# EAGLE board LED_board (EAGLE 9.6.2)
REV: A
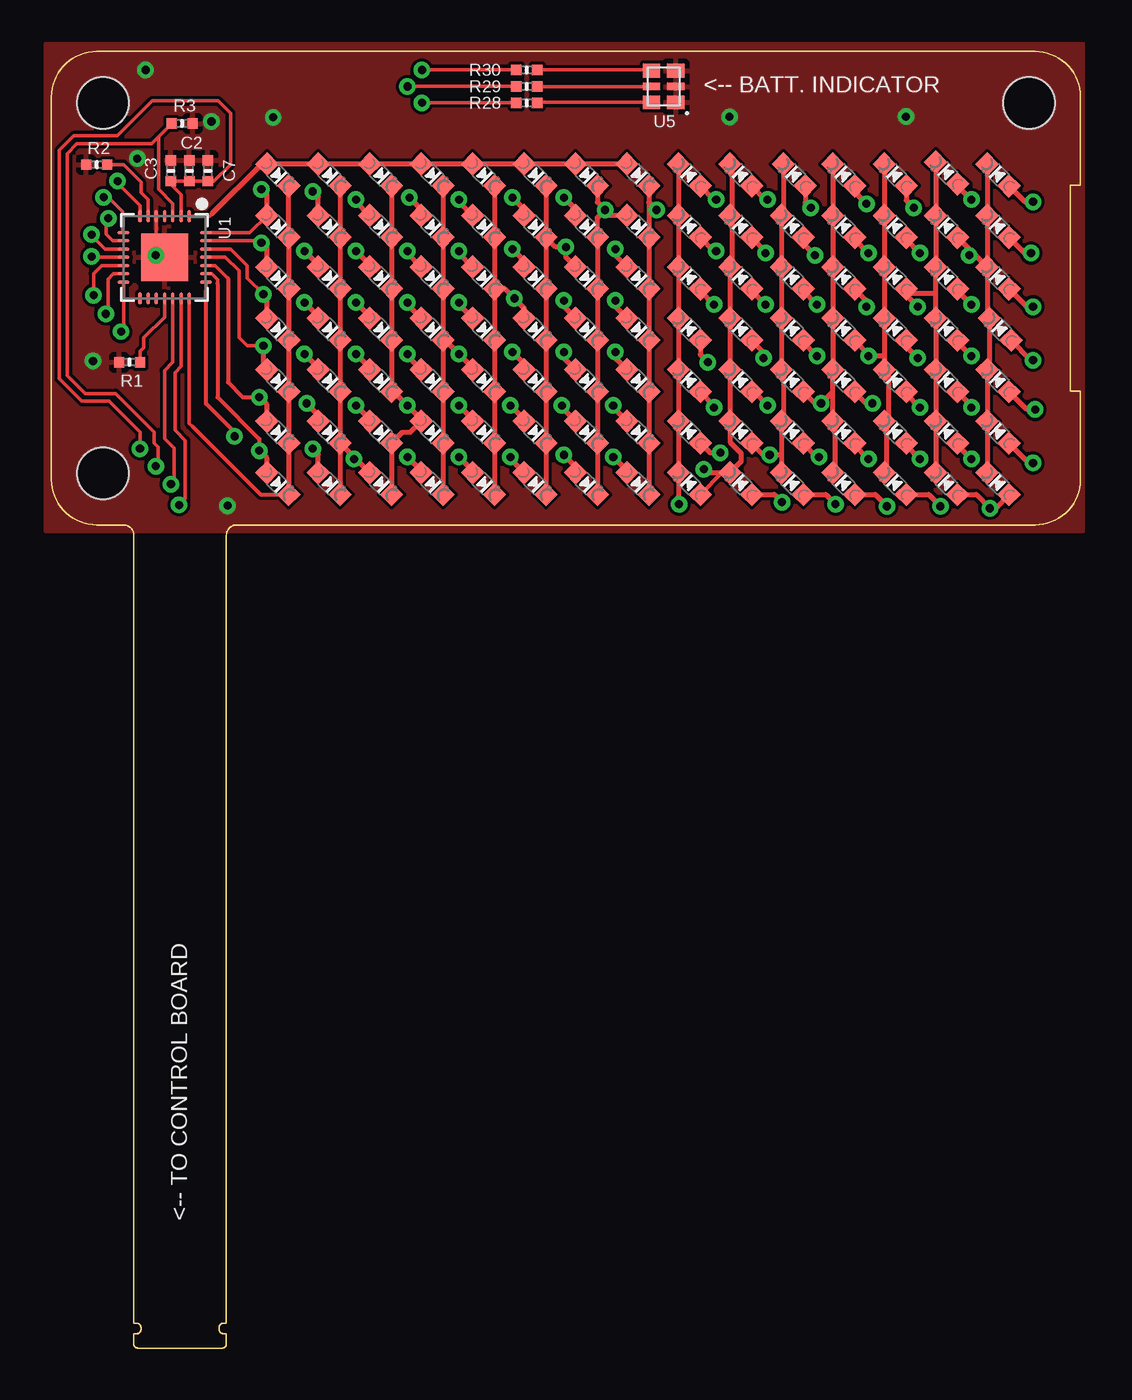
[diagram p0: board, top side]
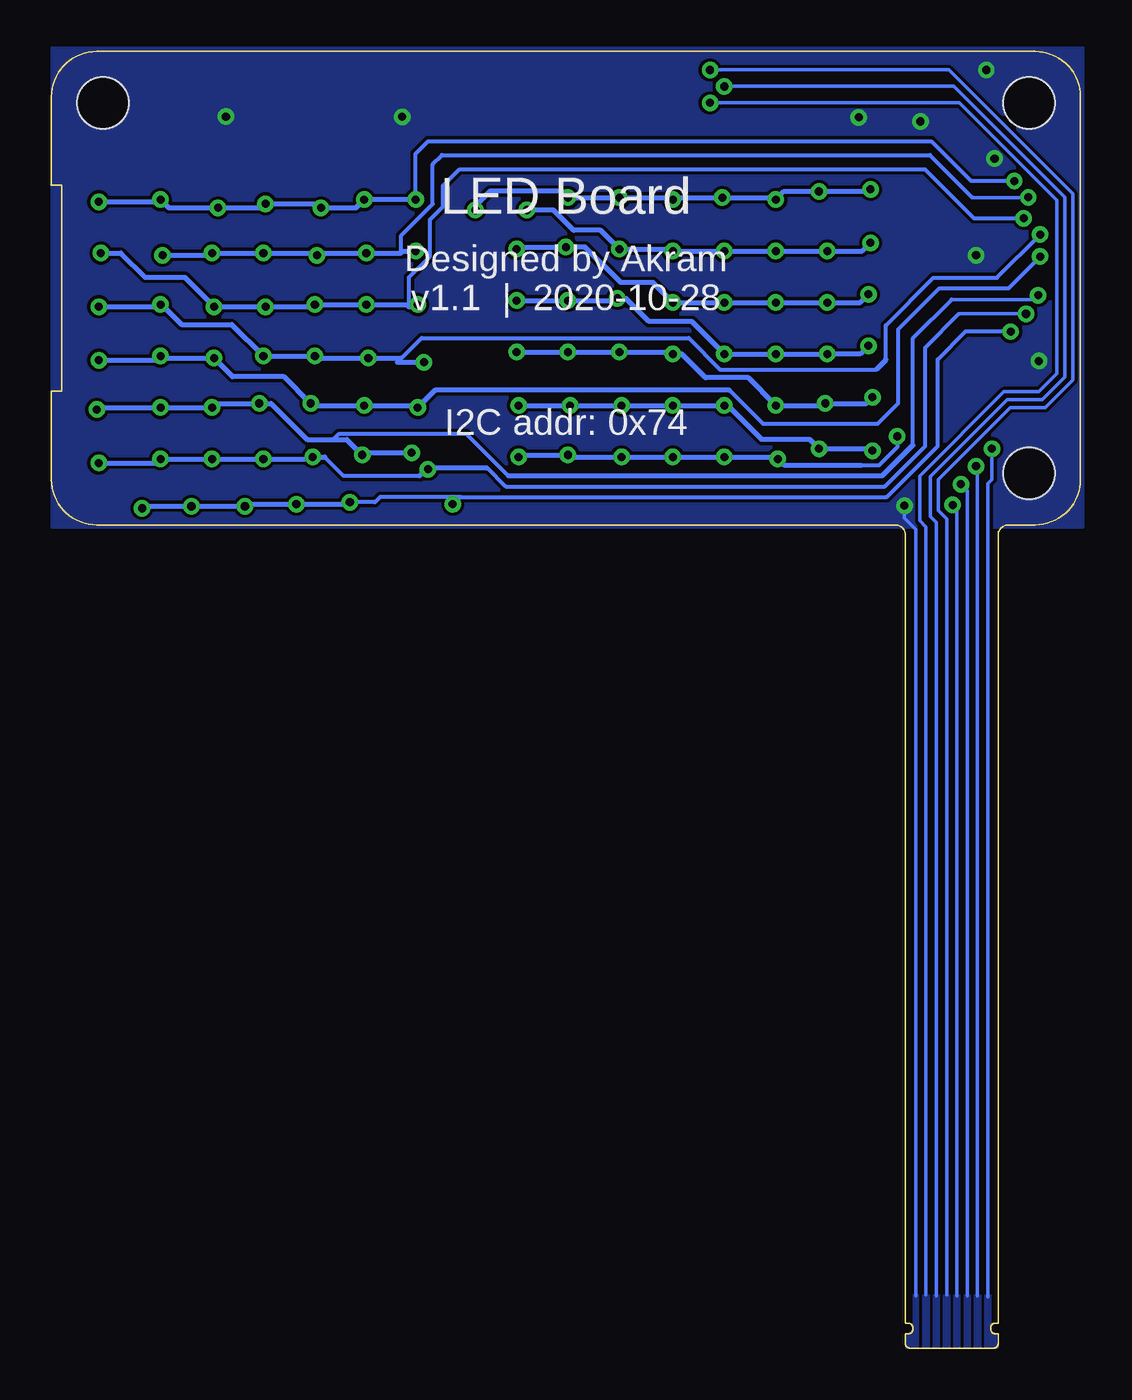
[diagram p1: board, bottom side, seen from below]

Size 50 x 63 mm. Coordinates in mm from the lower left corner, seen from the top.
Outline: 47.8,40 9,40 arc90 8.5,39.5 8.5,1.2 8.35,1.2 arc90 8.15,1 8.15,0.9 arc90 8.35,0.7 8.5,0.7 8.5,0.2 arc-90 8.3,0 4.2,0 arc-90 4,0.2 4,0.7 4.15,0.7 arc90 4.35,0.9 4.35,1 arc90 4.15,1.2 4,1.2 4,39.5 arc90 3.5,40 2.2,40 arc-90 0,42.2 0,60.8 arc-90 2.2,63 47.8,63 arc-90 50,60.8 50,56.5 49.5,56.5 49.5,46.5 50,46.5 50,42.2 arc-90 47.8,40
Copper layers (1*16): Top 0.035mm / dielectric 1.5mm / Bottom 0.035mm
Design rules "adafruit *": minimum track width 7mil, minimum drill 15.5mil, track to track 6mil, track to pad 6mil, pad to pad 6mil, via to via 6mil, smd to smd 6mil, copper to edge 0mil, drill to drill 8mil, minimum pad ring 10mil, minimum via ring 8mil, stop-mask expansion 2mil, vias tented up to drill 20mil, thermal gap 10mil
Holes 2.5 mm at 2.5,60.5 2.5,42.5 47.5,60.5

## Footprints (pad centres in the part's own frame; a part is rotated, then mirrored left to right if it is on the bottom)
CHIPLED_0603_NOOUTLINE = smd 0.8 x 0.8: A 0,-0.75; C 0,0.75
MICROBUILDER__0402MP = smd 0.5 x 0.5: 1 -0.508,0; 2 0.508,0
QFN28_4MM_0.4MM = smd 0.6 x 0.18: 1 -2,1.2; 2 -2,0.8; 3 -2,0.4; 4 -2,0; 5 -2,-0.4; 6 -2,-0.8; 7 -2,-1.2; 15 2,-1.2; 16 2,-0.8; 17 2,-0.4; 18 2,0; 19 2,0.4; 20 2,0.8; 21 2,1.2 | smd 0.18 x 0.6: 8 -1.2,-2; 9 -0.8,-2; 10 -0.4,-2; 11 0,-2; 12 0.4,-2; 13 0.8,-2; 14 1.2,-2; 22 1.2,2; 23 0.8,2; 24 0.4,2; 25 0,2; 26 -0.4,2; 27 -0.8,2; 28 -1.2,2 | smd 2.3 x 2.3: THERMAL 0,0
SMD-6 = smd 0.67 x 0.83: B+ 1.675,0.215; B- 1.675,1.385; R+ 0.135,0.215; R- 0.135,1.385 | smd 0.37 x 0.83: G+ 0.905,0.215; G- 0.905,1.385

## Placement (x,y rotation side)
C1-2  [CHIPLED_0603_NOOUTLINE]  11,42 225 top
C1-3  [CHIPLED_0603_NOOUTLINE]  11,44.5 225 top
C1-4  [CHIPLED_0603_NOOUTLINE]  11,47 225 top
C1-5  [CHIPLED_0603_NOOUTLINE]  11,49.5 225 top
C1-6  [CHIPLED_0603_NOOUTLINE]  11,52 225 top
C1-7  [CHIPLED_0603_NOOUTLINE]  11,54.5 225 top
C1-8  [CHIPLED_0603_NOOUTLINE]  11,57 225 top
C2  0.1uF  [MICROBUILDER__0402MP]  6.7,57.2 90 top
C2-2  [CHIPLED_0603_NOOUTLINE]  13.5,42 225 top
C2-3  [CHIPLED_0603_NOOUTLINE]  13.5,44.5 225 top
C2-4  [CHIPLED_0603_NOOUTLINE]  13.5,47 225 top
C2-5  [CHIPLED_0603_NOOUTLINE]  13.5,49.5 225 top
C2-6  [CHIPLED_0603_NOOUTLINE]  13.5,52 225 top
C2-7  [CHIPLED_0603_NOOUTLINE]  13.5,54.5 225 top
C2-8  [CHIPLED_0603_NOOUTLINE]  13.5,57 225 top
C2-9  [CHIPLED_0603_NOOUTLINE]  46,57 45 top
C2-10  [CHIPLED_0603_NOOUTLINE]  46,54.5 45 top
C2-11  [CHIPLED_0603_NOOUTLINE]  46,52 45 top
C2-12  [CHIPLED_0603_NOOUTLINE]  46.1,49.5 45 top
C2-13  [CHIPLED_0603_NOOUTLINE]  46,47 45 top
C2-14  [CHIPLED_0603_NOOUTLINE]  46,44.5 45 top
C2-15  [CHIPLED_0603_NOOUTLINE]  46,42 45 top
C3  10uF  [MICROBUILDER__0402MP]  5.8,57.2 90 top
C3-2  [CHIPLED_0603_NOOUTLINE]  16,42 225 top
C3-3  [CHIPLED_0603_NOOUTLINE]  16,44.5 225 top
C3-4  [CHIPLED_0603_NOOUTLINE]  16,47 225 top
C3-5  [CHIPLED_0603_NOOUTLINE]  16,49.5 225 top
C3-6  [CHIPLED_0603_NOOUTLINE]  16,52 225 top
C3-7  [CHIPLED_0603_NOOUTLINE]  16,54.5 225 top
C3-8  [CHIPLED_0603_NOOUTLINE]  16,57 225 top
C3-9  [CHIPLED_0603_NOOUTLINE]  43.5,57.1 45 top
C3-10  [CHIPLED_0603_NOOUTLINE]  43.5,54.5 45 top
C3-11  [CHIPLED_0603_NOOUTLINE]  43.5,52 45 top
C3-12  [CHIPLED_0603_NOOUTLINE]  43.5,49.5 45 top
C3-13  [CHIPLED_0603_NOOUTLINE]  43.5,47 45 top
C3-14  [CHIPLED_0603_NOOUTLINE]  43.5,44.5 45 top
C3-15  [CHIPLED_0603_NOOUTLINE]  43.5,42 45 top
C4-2  [CHIPLED_0603_NOOUTLINE]  18.5,42 225 top
C4-3  [CHIPLED_0603_NOOUTLINE]  18.5,44.5 225 top
C4-4  [CHIPLED_0603_NOOUTLINE]  18.5,47 225 top
C4-5  [CHIPLED_0603_NOOUTLINE]  18.5,49.5 225 top
C4-6  [CHIPLED_0603_NOOUTLINE]  18.5,52 225 top
C4-7  [CHIPLED_0603_NOOUTLINE]  18.5,54.5 225 top
C4-8  [CHIPLED_0603_NOOUTLINE]  18.5,57 225 top
C4-9  [CHIPLED_0603_NOOUTLINE]  41,57 45 top
C4-10  [CHIPLED_0603_NOOUTLINE]  41,54.5 45 top
C4-11  [CHIPLED_0603_NOOUTLINE]  41,52 45 top
C4-12  [CHIPLED_0603_NOOUTLINE]  41,49.5 45 top
C4-13  [CHIPLED_0603_NOOUTLINE]  41,47 45 top
C4-14  [CHIPLED_0603_NOOUTLINE]  41,44.5 45 top
C4-15  [CHIPLED_0603_NOOUTLINE]  41,42 45 top
C5-2  [CHIPLED_0603_NOOUTLINE]  21,42 225 top
C5-3  [CHIPLED_0603_NOOUTLINE]  21,44.5 225 top
C5-4  [CHIPLED_0603_NOOUTLINE]  21,47 225 top
C5-5  [CHIPLED_0603_NOOUTLINE]  21,49.5 225 top
C5-6  [CHIPLED_0603_NOOUTLINE]  21,52 225 top
C5-7  [CHIPLED_0603_NOOUTLINE]  21,54.5 225 top
C5-8  [CHIPLED_0603_NOOUTLINE]  21,57 225 top
C5-9  [CHIPLED_0603_NOOUTLINE]  38.5,57 45 top
C5-10  [CHIPLED_0603_NOOUTLINE]  38.5,54.5 45 top
C5-11  [CHIPLED_0603_NOOUTLINE]  38.5,52 45 top
C5-12  [CHIPLED_0603_NOOUTLINE]  38.5,49.5 45 top
C5-13  [CHIPLED_0603_NOOUTLINE]  38.5,47 45 top
C5-14  [CHIPLED_0603_NOOUTLINE]  38.5,44.5 45 top
C5-15  [CHIPLED_0603_NOOUTLINE]  38.5,42 45 top
C6-2  [CHIPLED_0603_NOOUTLINE]  23.5,42 225 top
C6-3  [CHIPLED_0603_NOOUTLINE]  23.5,44.5 225 top
C6-4  [CHIPLED_0603_NOOUTLINE]  23.5,47 225 top
C6-5  [CHIPLED_0603_NOOUTLINE]  23.5,49.5 225 top
C6-6  [CHIPLED_0603_NOOUTLINE]  23.5,52 225 top
C6-7  [CHIPLED_0603_NOOUTLINE]  23.5,54.5 225 top
C6-8  [CHIPLED_0603_NOOUTLINE]  23.5,57 225 top
C6-9  [CHIPLED_0603_NOOUTLINE]  36.1,57 45 top
C6-10  [CHIPLED_0603_NOOUTLINE]  36,54.5 45 top
C6-11  [CHIPLED_0603_NOOUTLINE]  36,52 45 top
C6-12  [CHIPLED_0603_NOOUTLINE]  36,49.5 45 top
C6-13  [CHIPLED_0603_NOOUTLINE]  36,47 45 top
C6-14  [CHIPLED_0603_NOOUTLINE]  36,44.5 45 top
C6-15  [CHIPLED_0603_NOOUTLINE]  36,42 45 top
C7  10uF  [MICROBUILDER__0402MP]  7.6,57.2 90 top
C7-2  [CHIPLED_0603_NOOUTLINE]  26,42 225 top
C7-3  [CHIPLED_0603_NOOUTLINE]  26,44.5 225 top
C7-4  [CHIPLED_0603_NOOUTLINE]  26,47 225 top
C7-5  [CHIPLED_0603_NOOUTLINE]  26,49.5 225 top
C7-6  [CHIPLED_0603_NOOUTLINE]  26,52 225 top
C7-7  [CHIPLED_0603_NOOUTLINE]  26,54.5 225 top
C7-8  [CHIPLED_0603_NOOUTLINE]  26,57 225 top
C7-9  [CHIPLED_0603_NOOUTLINE]  33.5,57 45 top
C7-10  [CHIPLED_0603_NOOUTLINE]  33.5,54.5 45 top
C7-11  [CHIPLED_0603_NOOUTLINE]  33.5,52 45 top
C7-12  [CHIPLED_0603_NOOUTLINE]  33.5,49.5 45 top
C7-13  [CHIPLED_0603_NOOUTLINE]  33.5,47 45 top
C7-14  [CHIPLED_0603_NOOUTLINE]  33.5,44.5 45 top
C7-15  [CHIPLED_0603_NOOUTLINE]  33.5,42 45 top
C8-2  [CHIPLED_0603_NOOUTLINE]  28.5,42 225 top
C8-3  [CHIPLED_0603_NOOUTLINE]  28.5,44.5 225 top
C8-4  [CHIPLED_0603_NOOUTLINE]  28.5,47 225 top
C8-5  [CHIPLED_0603_NOOUTLINE]  28.5,49.5 225 top
C8-6  [CHIPLED_0603_NOOUTLINE]  28.5,52 225 top
C8-7  [CHIPLED_0603_NOOUTLINE]  28.5,54.5 225 top
C8-8  [CHIPLED_0603_NOOUTLINE]  28.5,57 225 top
C8-9  [CHIPLED_0603_NOOUTLINE]  31,57 45 top
C8-10  [CHIPLED_0603_NOOUTLINE]  31,54.5 45 top
C8-11  [CHIPLED_0603_NOOUTLINE]  31,52 45 top
C8-12  [CHIPLED_0603_NOOUTLINE]  31,49.5 45 top
C8-13  [CHIPLED_0603_NOOUTLINE]  31,47 45 top
C8-14  [CHIPLED_0603_NOOUTLINE]  31,44.5 45 top
C8-15  [CHIPLED_0603_NOOUTLINE]  31,42 45 top
R1  10K  [MICROBUILDER__0402MP]  3.8,47.9 180 top
R2  10K  [MICROBUILDER__0402MP]  2.2,57.5 180 top
R3  10K  [MICROBUILDER__0402MP]  6.35,59.5 0 top
R28  1K  [MICROBUILDER__0402MP]  23.1,60.5 180 top
R29  1K  [MICROBUILDER__0402MP]  23.1,61.3 180 top
R30  1K  [MICROBUILDER__0402MP]  23.1,62.1 180 top
U1  IS31FL3731-SALS2  [QFN28_4MM_0.4MM]  5.5,53 270 top
U5  MSL0402RGBU1  [SMD-6]  28.95,62.2 270 top

## Library data of the parts
C1-2-C1-8 C2-2-C2-15 C3-2-C3-15 C4-2-C4-15 C5-2-C5-15 C6-2-C6-15 C7-2-C7-15 C8-2-C8-15 U1 = microbuilder
C2 C3 C7 = Adafruit Feather 32u4 Bluefruit LE; MPN: GRM155R71C104KA88J
R1-R3 R28-R30 = Adafruit Feather 32u4 Bluefruit LE; MPN: RC0402FR-7W10KL
U5 = MSL0402RGBU1; MPN: MSL0402RGBU1

## Nets
ADDR: R1.1 U1.18
BLUE: R28.2
CA1: C1-2.C C1-3.C C1-4.C C1-5.C C1-6.C C1-7.C C1-8.C U1.21
CA2: C2-2.C C2-3.C C2-4.C C2-5.C C2-6.C C2-7.C C2-8.C C3-2.A C4-2.A C5-2.A C6-2.A C7-2.A C8-2.A U1.22
CA3: C1-2.A C2-2.A C3-2.C C3-3.C C3-4.C C3-5.C C3-6.C C3-7.C C3-8.C C4-3.A C5-3.A C6-3.A C7-3.A C8-3.A U1.23
CA4: C1-3.A C2-3.A C3-3.A C4-2.C C4-3.C C4-4.C C4-5.C C4-6.C C4-7.C C4-8.C C5-4.A C6-4.A C7-4.A C8-4.A U1.24
CA5: C1-4.A C2-4.A C3-4.A C4-4.A C5-2.C C5-3.C C5-4.C C5-5.C C5-6.C C5-7.C C5-8.C C6-5.A C7-5.A C8-5.A U1.25
CA6: C1-5.A C2-5.A C3-5.A C4-5.A C5-5.A C6-2.C C6-3.C C6-4.C C6-5.C C6-6.C C6-7.C C6-8.C C7-6.A C8-6.A U1.26
CA7: C1-6.A C2-6.A C3-6.A C4-6.A C5-6.A C6-6.A C7-2.C C7-3.C C7-4.C C7-5.C C7-6.C C7-7.C C7-8.C C8-7.A U1.27
CA8: C1-7.A C2-7.A C3-7.A C4-7.A C5-7.A C6-7.A C7-7.A C8-2.C C8-3.C C8-4.C C8-5.C C8-6.C C8-7.C C8-8.C U1.28
CA9: C1-8.A C2-8.A C3-8.A C4-8.A C5-8.A C6-8.A C7-8.A C8-8.A U1.1
CB1: C2-9.A C3-9.A C4-9.A C5-9.A C6-9.A C7-9.A C8-9.A U1.7
CB2: C2-9.C C2-10.C C2-11.C C2-12.C C2-13.C C2-14.C C2-15.C C3-10.A C4-10.A C5-10.A C6-10.A C7-10.A C8-10.A U1.8
CB3: C2-10.A C3-9.C C3-10.C C3-11.C C3-12.C C3-13.C C3-14.C C3-15.C C4-11.A C5-11.A C6-11.A C7-11.A C8-11.A U1.9
CB4: C2-11.A C3-11.A C4-9.C C4-10.C C4-11.C C4-12.C C4-13.C C4-14.C C4-15.C C5-12.A C6-12.A C7-12.A C8-12.A U1.10
CB5: C2-12.A C3-12.A C4-12.A C5-9.C C5-10.C C5-11.C C5-12.C C5-13.C C5-14.C C5-15.C C6-13.A C7-13.A C8-13.A U1.11
CB6: C2-13.A C3-13.A C4-13.A C5-13.A C6-9.C C6-10.C C6-11.C C6-12.C C6-13.C C6-14.C C6-15.C C7-14.A C8-14.A U1.12
CB7: C2-14.A C3-14.A C4-14.A C5-14.A C6-14.A C7-9.C C7-10.C C7-11.C C7-12.C C7-13.C C7-14.C C7-15.C C8-15.A U1.13
CB8: C2-15.A C3-15.A C4-15.A C5-15.A C6-15.A C7-15.A C8-9.C C8-10.C C8-11.C C8-12.C C8-13.C C8-14.C C8-15.C U1.14
GND: C2.2 C3.2 C7.2 R1.2 R2.2 R3.2 U1.5 U1.THERMAL U5.B- U5.G- U5.R-
GREEN: R29.2
N$16: R28.1 U5.B+
N$18: R30.1 U5.R+
N$24: R29.1 U5.G+
R_EXT: R2.1 U1.6
RED: R30.2
SCL: U1.20
SDA: U1.19
SDB: R3.1 U1.3
VCC: C2.1 C3.1 C7.1 U1.2

## Tracks (layer width: path | path; a pad name or v marks a point on that pad's centre or on a via)
ADDR
  Top 0.178: R1.1 4.31,48.43 4.49,48.62 4.49,49.09 5.5,50.1 U1.18
BLUE  (via drill 0.39)
  Top 0.178: R28.2 v18,60.5
  Bottom 0.178: v18,60.5 5.88,60.5 1.14,55.77 1.14,47.34 2.02,46.46 3.72,46.46 7.8,42.38 7.8,40.2 7.5,39.9 7.5,2.6
  pour Bottom: 7.35,2.6 7.35,0 7.65,0 7.65,2.6
CA1
  Top 0.178: U1.21 6.7,44.93 6.86,44.76
  Top 0.203: 6.86,44.76 10.16,41.47 C1-2.C
  Top 0.254: C1-2.C C1-3.C C1-4.C C1-5.C C1-6.C C1-7.C C1-8.C
CA2  (via drill 0.39)
  Top 0.178: 7.51,51.36 7.51,51.79 U1.22
  Top 0.203: 7.51,51.36 7.51,45.89 8.9,44.5 v8.9,44.3
  Top 0.254: C2-3.C C2-4.C C2-5.C C2-6.C C2-7.C C2-8.C | C4-2.A 17.97,42.63 v17.3,43.3 | C5-2.A 20.47,42.63 v19.8,43.3 | C7-2.A 25.47,42.83 v24.9,43.4 | C8-2.A 27.97,42.63 v27.3,43.3 | C2-3.C C2-2.C | C6-2.A 22.3,43.2 v22.3,43.3 | C3-2.A 14.8,43.2 v14.7,43.2 14.7,43.3 C2-3.C
  Bottom 0.203: 10.65,42.88 9.79,42.88 8.9,43.77 v8.9,44.3
  Bottom 0.254: v27.3,43.3 27.2,43.4 v24.9,43.4 24.8,43.3 v22.3,43.3 v19.8,43.3 v17.3,43.3 14.8,43.3 v14.7,43.2 14.38,42.88 10.65,42.88
CA3  (via drill 0.39)
  Top 0.178: 8.07,51.73 8.07,51.91 7.78,52.2 U1.23
  Top 0.203: 8.07,51.73 8.07,46.2 10.1,44.17 v10.1,43.6
  Top 0.254: C3-2.C C3-3.C 17.06,44.5 17.44,44.5 C4-3.A 17.97,45.13 v17.3,45.8 16.63,46.47 C3-4.C C3-5.C C3-6.C C3-7.C C3-8.C | C8-3.A 27.3,45.7 v27.3,45.8 | C7-3.A 24.8,45.7 v24.8,45.8 | C6-3.A 22.97,45.13 v22.3,45.8 | C5-3.A 20.47,45.13 v19.8,45.8 | C2-2.A 12.97,43.43 v12.7,43.7 | C1-2.A 10.47,43.23 v10.1,43.6
  Bottom 0.254: v10.1,43.6 10.2,43.7 v12.7,43.7 13.15,44.15 15.48,44.15 17.13,45.8 v17.3,45.8 v19.8,45.8 v22.3,45.8 v24.8,45.8 v27.3,45.8
CA4  (via drill 0.39)
  Top 0.178: U1.24 7.95,52.6 8.58,51.97
  Top 0.203: 8.58,51.97 8.58,46.92 9.3,46.2 v10.1,46.2
  Top 0.254: C4-2.C C4-3.C C4-4.C C4-5.C | C4-5.C C4-6.C C4-7.C C4-8.C | C8-4.A 27.4,48.1 v27.4,48.4 | C7-4.A 24.9,48.1 v24.9,48.4 | C6-4.A 22.97,47.83 v22.4,48.4 | C5-4.A 20.47,47.63 v19.8,48.3 19.13,48.97 C4-5.C | C2-3.A 12.97,45.33 v12.4,45.9 | C3-3.A 15.47,45.13 v14.8,45.8 | C1-3.A 10.47,45.83 v10.1,46.2
  Bottom 0.254: v27.4,48.4 v24.9,48.4 v22.4,48.4 19.9,48.4 v19.8,48.3 19.37,48.3 18.22,47.14 16.14,47.14 v14.8,45.8 12.5,45.8 v12.4,45.9 10.4,45.9 v10.1,46.2
CA5  (via drill 0.39)
  Top 0.178: v10.3,48.7 9.5,48.7 9.11,49.09 9.11,52.34 8.45,53 U1.25
  Top 0.254: C5-8.C C5-7.C C5-6.C | C5-6.C C5-5.C C5-4.C C5-3.C C5-2.C | C4-4.A 17.3,48.2 v17.3,48.3 | C3-4.A 15.47,47.63 v14.8,48.3 | C8-5.A 27.4,50.6 v27.4,50.9 | C7-5.A 24.9,50.6 v24.9,50.9 | C6-5.A 22.97,50.53 v22.5,51 22.03,51.47 C5-6.C | C1-4.A 10.3,47.7 v10.3,48.7 | v12.3,48.3 12.97,47.63 C2-4.A
  Bottom 0.254: v27.4,50.9 v24.9,50.9 22.6,50.9 v22.5,51 22.07,51 20.96,49.88 18.88,49.88 v17.3,48.3 v14.8,48.3 v12.3,48.3 10.7,48.3 v10.3,48.7
CA6  (via drill 0.39)
  Top 0.178: v10.3,51.2 9.51,51.99 9.51,52.6 8.71,53.4 U1.26
  Top 0.254: C6-8.C C6-7.C | C6-2.C C6-3.C C6-4.C C6-5.C C6-6.C C6-7.C | C5-5.A 19.8,50.7 v19.8,50.8 | C4-5.A 17.3,50.7 v17.3,50.8 | C3-5.A 15.47,50.13 v14.8,50.8 | C2-5.A 12.97,50.13 v12.3,50.8 | C7-6.A 25,53 v25,53.5 24.5,53.5 C6-7.C | C8-6.A 27.4,53.1 v27.4,53.4 | C1-5.A 10.47,51.03 v10.3,51.2
  Bottom 0.254: v27.4,53.4 27.3,53.5 v25,53.5 24.07,53.5 22.34,51.77 20.77,51.77 v19.8,50.8 v17.3,50.8 v14.8,50.8 v12.3,50.8 10.7,50.8 v10.3,51.2
CA7  (via drill 0.39)
  Top 0.178: U1.27 10.2,53.8 10.37,53.63
  Top 0.254: C7-2.C C7-3.C C7-4.C C7-5.C C7-6.C C7-7.C 26.53,54.93 v26.9,55.3 | C2-6.A 12.97,52.63 v12.3,53.3 | C3-6.A 15.47,52.63 v14.8,53.3 | C4-6.A 17.3,53.2 v17.3,53.3 | C5-6.A 19.8,53.2 v19.8,53.3 | C6-6.A 22.97,52.83 v22.4,53.4 | C7-8.C 26.53,55.67 v26.9,55.3 | C8-7.A 27.17,55.03 v26.9,55.3 | C1-6.A 10.47,53.43 10.37,53.53 | 10.37,53.53 10.37,53.63 | 10.37,53.53 v10.2,53.7
  Bottom 0.254: v26.9,55.3 25.61,55.3 24.62,54.31 23.31,54.31 v22.4,53.4 19.9,53.4 v19.8,53.3 v17.3,53.3 v14.8,53.3 v12.3,53.3 10.6,53.3 v10.2,53.7
CA8  (via drill 0.39)
  Top 0.178: U1.28 9.64,54.2 C1-7.A
  Top 0.254: C8-2.C C8-3.C C8-4.C C8-5.C C8-6.C C8-7.C C8-8.C 29.03,55.67 v29.4,55.3 | C7-7.A 25.47,55.33 v24.9,55.9 | v19.8,55.8 19.8,55.7 C5-7.A | C4-7.A 17.97,55.33 v17.4,55.9 | C3-7.A 14.8,55.7 v14.8,55.8 | C2-7.A 12.97,55.93 v12.7,56.2 | C1-7.A 10.47,56.03 v10.2,56.3 | v22.4,55.9 22.97,55.33 C6-7.A
  Bottom 0.254: v29.4,55.3 29.4,55.5 28.69,56.22 25.21,56.22 v24.9,55.9 v22.4,55.9 19.9,55.9 v19.8,55.8 19.7,55.9 v17.4,55.9 14.9,55.9 v14.8,55.8 14.4,56.2 v12.7,56.2 10.3,56.2 v10.2,56.3
CA9
  Top 0.178: 7.79,55.11 7.69,55 U1.1
  Top 0.254: C8-8.A C7-8.A C6-8.A C5-8.A C4-8.A C3-8.A C2-8.A C1-8.A 10.22,57.53 7.79,55.11
CB1  (via drill 0.39)
  Top 0.178: U1.7 4.3,55.5 3.21,56.59 v3.21,56.7
  Top 0.254: v44.7,55.8 44.03,56.47 C3-9.A | v41.9,55.4 41.53,55.77 C4-9.A | v39.6,55.6 39.03,56.17 C5-9.A | C6-9.A 36.63,55.67 v36.9,55.4 | v34.8,55.8 34.7,55.8 C7-9.A | v32.3,55.8 32.2,55.8 C8-9.A | v47.7,55.7 47.3,55.7 C2-9.A
  Bottom 0.203: v3.21,56.7 5.31,56.7 7.25,58.64 31.7,58.64 32.3,58.04 v32.3,55.8
  Bottom 0.254: v47.7,55.7 44.8,55.7 v44.7,55.8 44.3,55.4 v41.9,55.4 39.8,55.4 v39.6,55.6 37.1,55.6 v36.9,55.4 35.2,55.4 v34.8,55.8 v32.3,55.8
CB2  (via drill 0.39)
  Top 0.178: v2.53,55.91 2.76,55.91 3.45,55.22 3.45,54.25 U1.8
  Top 0.254: C2-11.C 45.47,50.13 C2-12.C 45.57,47.63 C2-13.C C2-14.C C2-15.C | C2-9.C C2-10.C C2-11.C | v34.7,53.2 34.7,53.3 C7-10.A | v37.1,53.1 36.53,53.67 C6-10.A | v39.7,53.2 39.03,53.87 C5-10.A | C4-10.A 41.53,53.87 v42.2,53.2 | C2-11.C 44.9,53.1 v44.6,53.1 44.6,53.4 C3-10.A | v32.3,53.3 32.2,53.3 C8-10.A
  Bottom 0.178: 5.25,55.9 v2.54,55.9 v2.53,55.91
  Bottom 0.203: 33,53.2 33,53.3 33,54.06 31.48,55.58 31.48,57.51 31.03,57.97 7.31,57.97 5.25,55.9
  Bottom 0.254: 33,53.2 v34.7,53.2 37,53.2 v37.1,53.1 37.2,53.2 v39.7,53.2 v42.2,53.2 42.3,53.1 v44.6,53.1 | 33,53.3 v32.3,53.3
CB3  (via drill 0.39)
  Top 0.178: v2.76,54.89 2.65,54.78 2.65,54.12 2.97,53.8 U1.9
  Top 0.254: C3-15.C C3-14.C C3-13.C C3-12.C 42.97,51.26 | 42.97,51.26 C3-11.C C3-10.C C3-9.C | 42.97,51.26 41.74,51.26 C4-11.A 41.53,51.17 v42.1,50.6 | v32.2,50.7 31.53,51.37 C8-11.A | C7-11.A 34.03,51.37 v34.7,50.7 | v37.2,50.7 36.53,51.37 C6-11.A | v39.6,50.6 39.6,50.9 C5-11.A | v47.6,53.2 47.3,53.2 C2-10.A
  Bottom 0.203: 32.62,50.6 32.62,50.7 32.62,52.02 31.61,53.04 31.61,54.82 30.97,55.45 30.97,56.47 30.16,57.28 7.55,57.28 5.17,54.89 v2.76,54.89
  Bottom 0.254: 32.62,50.7 v34.7,50.7 v37.2,50.7 37.3,50.6 v39.6,50.6 v42.1,50.6 43.52,52.02 45.45,52.02 46.63,53.2 v47.6,53.2 | 32.62,50.6 32.3,50.6 v32.2,50.7
CB4  (via drill 0.39)
  Top 0.178: v1.95,54.11 1.95,54.05 2.6,53.4 U1.10
  Top 0.254: C4-13.C C4-12.C C4-11.C C4-10.C C4-9.C | C4-13.C 40.47,48.2 v39.7,48.2 39.7,48.3 C5-12.A | C4-13.C 40.67,47.33 40.67,45.23 C4-14.C 40.57,44.93 40.57,42.63 C4-15.C | v44.7,50.7 44.03,51.37 C3-11.A | v31.9,47.9 31.53,48.27 C8-12.A | v34.6,48.1 34.6,48.4 C7-12.A | v37.2,48.2 36.53,48.87 C6-12.A | v47.7,50.6 47.4,50.6 C2-11.A
  Bottom 0.203: 33.19,47.9 32.99,48.1 32.02,49.08 19.03,49.08 17.51,47.55 9.92,47.55 | 9.46,48.05 9.46,49.69 7.14,52.01 4.05,52.01 v1.95,54.11
  Bottom 0.254: v47.7,50.6 44.8,50.6 v44.7,50.7 44.63,50.7 43.67,49.74 41.24,49.74 v39.7,48.2 v37.2,48.2 37.1,48.1 v34.6,48.1 32.99,48.1 | 33.19,47.9 v31.9,47.9 | 9.46,48.05 9.46,48.01 9.92,47.55
CB5  (via drill 0.39)
  Top 0.178: U1.11 1.99,53 v1.95,53.03
  Top 0.254: C4-12.A 41.53,48.67 v42.1,48.1 | C3-12.A 44.03,48.87 v44.7,48.2 | C5-15.C 38.07,42.63 38.07,44.93 C5-14.C 37.97,46.47 | 37.97,46.47 C5-13.C C5-12.C C5-11.C C5-10.C C5-9.C | 37.97,46.47 v37.4,45.9 37.1,45.9 C6-13.A | v32.2,45.7 32.2,45.8 C8-13.A | v47.7,48 47.6,48 C2-12.A | C7-13.A 34.13,46.47 v34.8,45.8
  Bottom 0.203: 17.05,46.54 15.42,44.91 9.84,44.91 8.85,45.91 8.85,49.5 6.85,51.5 3.49,51.5 v1.95,53.03
  Bottom 0.254: v47.7,48 44.9,48 v44.7,48.2 44.6,48.1 v42.1,48.1 41.2,47.2 38.7,47.2 v37.4,45.9 37.3,45.8 v34.8,45.8 32.3,45.8 v32.2,45.7 31.36,46.54 17.05,46.54
CB6  (via drill 0.39)
  Top 0.178: v2.05,51.16 2.05,52.21 2.45,52.6 U1.12
  Top 0.254: v47.8,45.6 47.4,45.6 C2-13.A | v44.7,45.7 44.7,45.8 C3-13.A | v42.2,45.7 41.53,46.37 C4-13.A | C6-9.C 35.57,55.13 C6-10.C C6-11.C C6-12.C C6-13.C 35.57,47.43 35.57,45.13 C6-14.C 35.47,43.4 | 35.47,43.4 C6-15.C | C7-14.A 34.6,43.4 v34.9,43.4 35.47,43.4 | v39.9,45.9 39.6,45.9 C5-13.A | C8-14.A 32,43.5 v32.5,43.5
  Bottom 0.178: v2.05,51.16 2.25,50.95 6.26,50.95
  Bottom 0.203: 8.14,43.87 8.14,49.07 6.26,50.95 | 27.8,42.37 29.83,44.4 36.05,44.4 36.31,44.15
  Bottom 0.254: v47.8,45.6 47.7,45.7 v44.7,45.7 v42.2,45.7 42,45.9 v39.9,45.9 39.33,45.9 37.58,44.15 36.31,44.15 35.65,44.15 v34.9,43.4 34.8,43.5 v32.5,43.5 | 8.14,43.87 9.64,42.37 27.8,42.37
CB7  (via drill 0.39)
  Top 0.178: v2.64,50.25 2.75,50.36 2.75,51.94 3.01,52.2 U1.13
  Top 0.203: C7-15.C 32.59,42.53 C8-15.A
  Top 0.254: v42.2,43.2 41.53,43.87 C4-14.A | v47.7,43 47.5,43 C2-14.A | v44.7,43.2 44.03,43.87 C3-14.A | C7-9.C 33.07,57.43 33.07,55.13 C7-10.C 33.07,54.93 33.07,52.63 C7-11.C C7-12.C C7-13.C C7-14.C 32.97,44.02 33.51,43.48 33.51,43.07 C7-15.C 31.87,42.53 v31.7,42.7 | v39.7,43.2 39.03,43.87 C5-14.A | v37.3,43.3 37.2,43.3 C6-14.A
  Bottom 0.178: 5.9,50.25 v2.64,50.25
  Bottom 0.203: 28.81,42.75 27.92,41.86 9.51,41.86 7.54,43.83 7.54,48.61 5.9,50.25 | 32.12,42.37 35.8,42.37 36.73,43.3
  Bottom 0.254: v47.7,43 44.9,43 v44.7,43.2 v42.2,43.2 v39.7,43.2 37.4,43.2 v37.3,43.3 36.73,43.3 | 28.81,42.75 31.7,42.75 v31.7,42.7 31.79,42.7 32.12,42.37
CB8  (via drill 0.39)
  Top 0.178: U1.14 3.5,49.5 v3.38,49.39
  Top 0.254: C8-9.C C8-10.C C8-11.C C8-12.C C8-13.C C8-14.C C8-15.C 30.5,42.5 v30.5,41 | C7-15.A 35.13,41.47 v35.5,41.1 | C6-15.A 37.63,41.47 v38.1,41 | C5-15.A 40.03,41.47 v40.6,40.9 | C4-15.A 42.63,41.47 v43.2,40.9 | C3-15.A 44.93,41.47 v45.6,40.8 45.86,40.8 C2-15.A
  Bottom 0.203: v30.5,41 30.14,41.36 | 30.14,41.36 9.41,41.36 6.93,43.83 6.93,48.04 5.58,49.39 v3.38,49.39 | 30.14,41.36 34.02,41.36 34.28,41.1 v35.5,41.1
  Bottom 0.254: v45.6,40.8 45.5,40.9 v43.2,40.9 v40.6,40.9 40.5,41 v38.1,41 35.6,41 v35.5,41.1
GND  (via drill 0.39)
  Top 0.178: v5.07,53.1 5.05,53.12 5.1,53.16 U1.5
  Bottom 0.178: v8.55,40.93 8.55,40.33 8,39.77 8,2.55
  other vias: 32.95,59.83 4.57,62.1 41.52,59.83 4.17,57.8 7.77,59.6 10.77,59.8 2.02,47.96
  pour Top: -0.3,63.36 -0.3,39.7 50.14,39.7 50.14,63.36
  pour Bottom: -0.1,63.16 -0.1,39.9 49.94,39.9 49.94,63.16
  pour Bottom (no thermals): 8.5,0.7 8.5,0 7.85,0 7.85,2.6 8.15,2.6 8.15,0.7
GREEN  (via drill 0.39)
  Top 0.178: R29.2 v17.3,61.3
  Bottom 0.178: v17.3,61.3 6.14,61.3 0.76,55.92 0.76,47.18 1.86,46.08 3.56,46.08 7.3,42.34 7.3,40.4 7,40.1 7,2.55
  pour Bottom: 6.85,2.6 6.85,0 7.15,0 7.15,2.6
N$16
  Top 0.178: R28.1 23.63,60.52 U5.B+
N$18
  Top 0.178: R30.1 29.13,62.1 U5.R+
N$24
  Top 0.178: U5.G+ R29.1
R_EXT
  Top 0.178: R2.1 3.5,57.5 4.35,56.65 4.35,56.15 4.7,55.8 U1.6
RED  (via drill 0.39)
  Top 0.178: R30.2 v18,62.1
  Bottom 0.178: v18,62.1 6.4,62.1 0.38,56.08 0.38,47.02 1.7,45.7 3.4,45.7 6.89,42.21 6.89,40.68 6.5,40.29 6.5,2.6
  pour Bottom: 6.35,2.6 6.35,0 6.65,0 6.65,2.6
SCL  (via drill 0.39)
  Top 0.178: v6.2,40.97 6.5,41.27 6.5,44.1 6,44.6 6,47.4 6.3,47.7 U1.20
  Bottom 0.178: v6.2,40.97 6.17,40.97 6,40.8 6,2.55
  pour Bottom: 5.85,2.6 5.85,0 6.15,0 6.15,2.6
SDA  (via drill 0.39)
  Top 0.178: v5.81,41.97 5.96,42.12 5.96,43.74 5.5,44.2 5.5,47.5 5.9,47.9 U1.19
  Bottom 0.178: v5.81,41.97 5.5,41.66 5.5,2.55
  pour Bottom: 5.35,2.6 5.35,0 5.65,0 5.65,2.6
SDB  (via drill 0.39)
  Top 0.178: v5.07,42.85 5.19,42.97 5.19,43.79 5,43.98 5,44.5 3.12,46.38 1.64,46.38 0.76,47.26 0.76,58.04 1.24,58.52 4.86,58.52 R3.1 5.2,58.86 5.2,56.3 5.9,55.6 U1.3
  Bottom 0.178: v5.07,42.85 5,42.78 5,2.55
  pour Bottom: 4.85,2.6 4.85,0 5.15,0 5.15,2.6
VCC  (via drill 0.39)
  Top 0.178: v4.3,43.7 4.3,44.5 2.8,46 1.48,46 0.38,47.1 0.38,58.2 1.08,58.9 3.2,58.9 4.9,60.6 8.1,60.6 8.7,60 8.7,57.5 7.89,56.69 C7.1 C2.1 C3.1 5.8,56.54 6.3,56.04 U1.2
  Bottom 0.178: v4.3,43.7 4.3,42.2 4.5,42 4.5,2.5
  pour Bottom (no thermals): 4,0.7 4,0 4.65,0 4.65,2.6 4.35,2.6 4.35,0.7

## Text on the board
bPlace: LED Board | Designed by Akram / v1.1 | 2020-10-28 | I2C addr: 0x74
tNames: <-- BATT. INDICATOR | <-- TO CONTROL BOARD